# Altium PCB Toygether_PCB.PcbDoc (part 2 of 2)
Units mm, origin at the board's own origin, x right, y up, seen from the top; angles counter-clockwise.
Board outline 55 x 58.13 mm, 4 copper layers (Top Layer, Signal Layer 1, Signal Layer 2, Bottom Layer), stack 0.778 mm thick; 93 components, 74 nets, 341 pads, 140 vias.
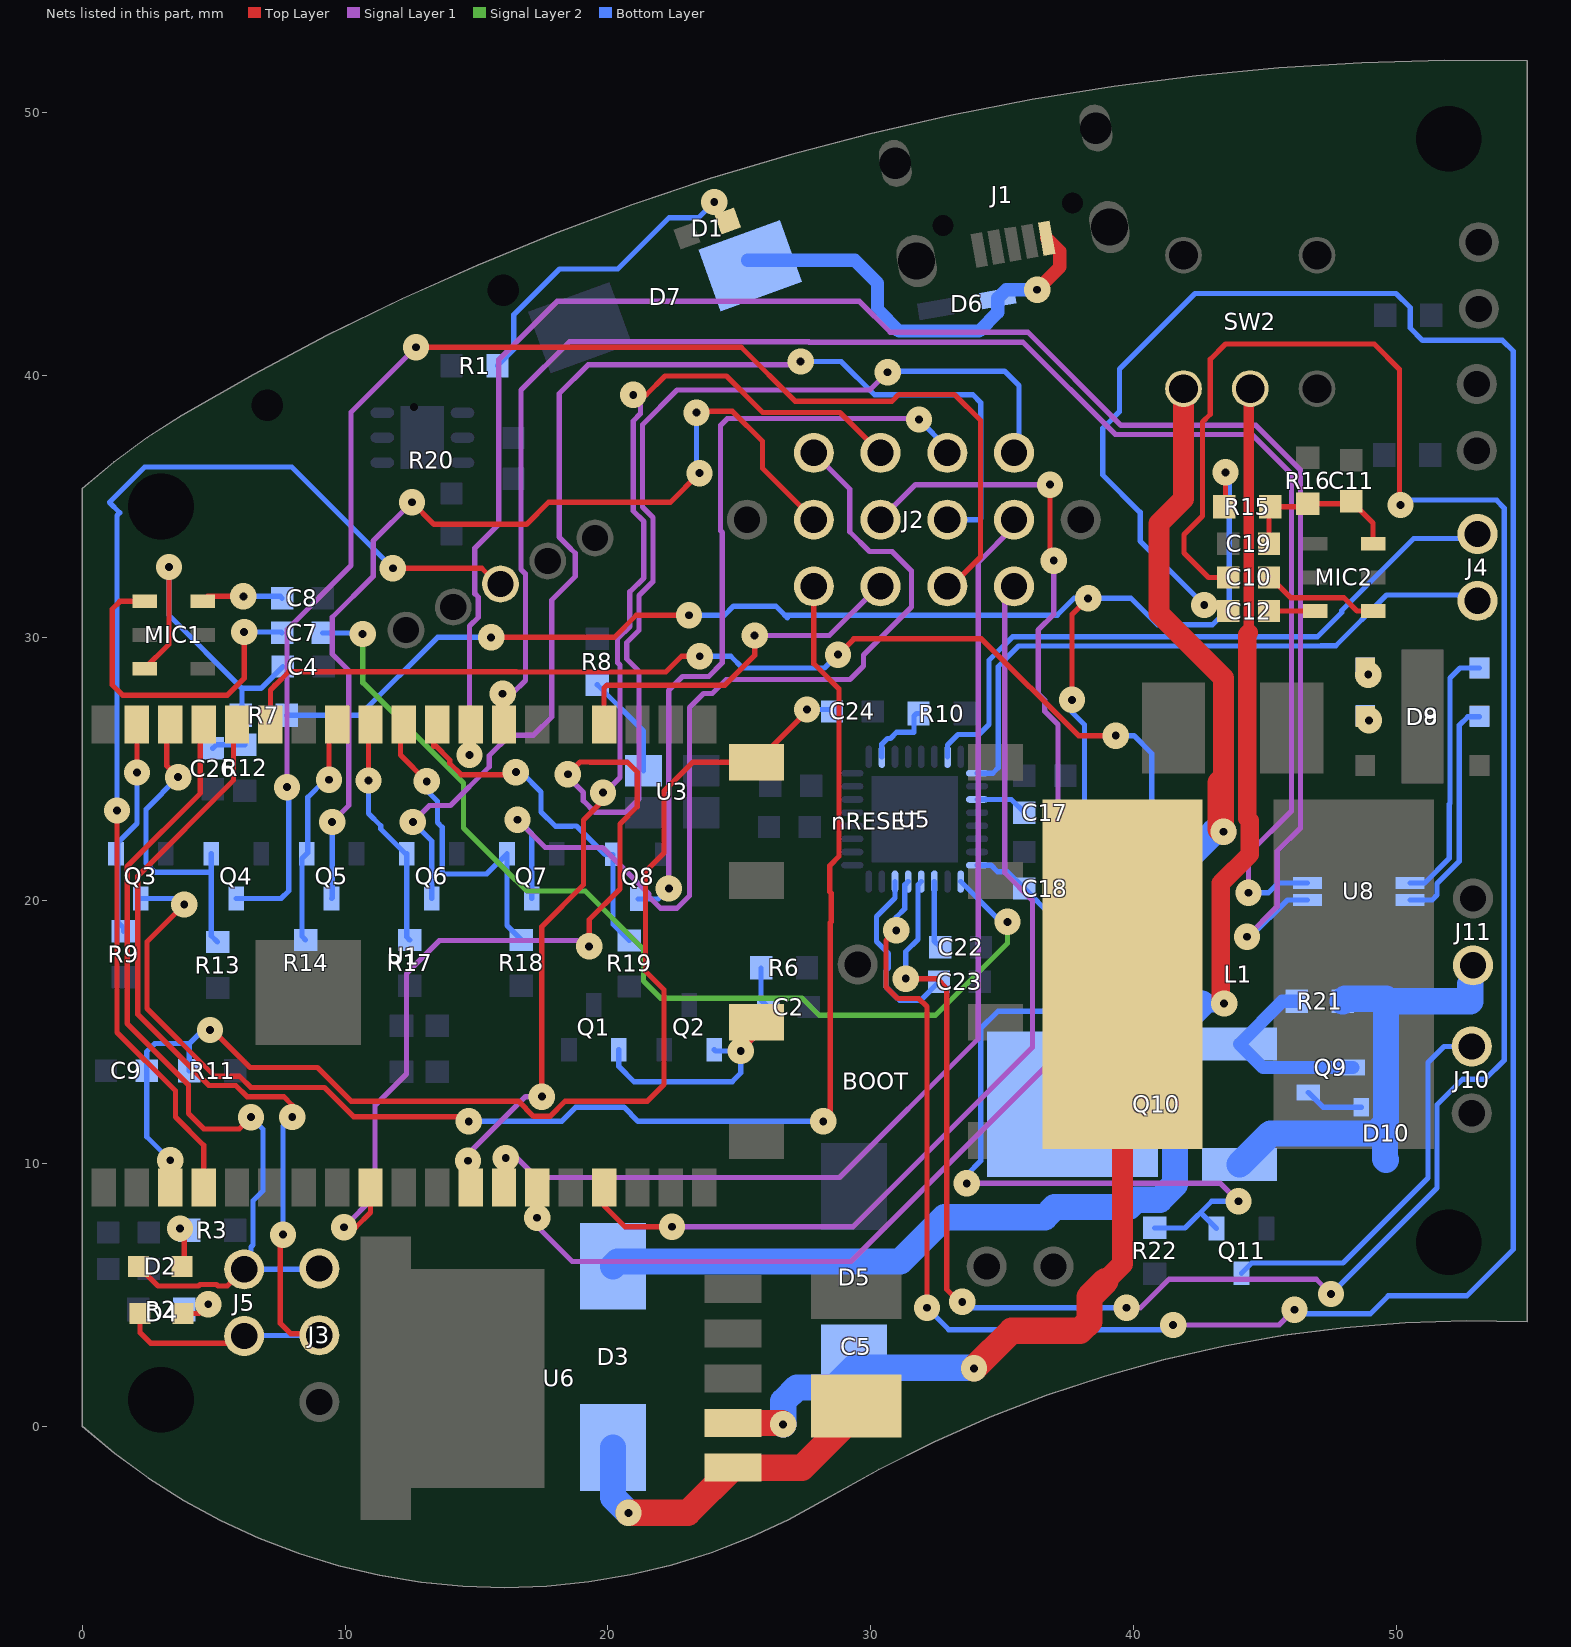
[diagram p4: the nets of this part, all layers, seen from the top]

## Via types
v1: diameter 1, hole 0.3, Top Layer to Bottom Layer, 132 vias
v2: diameter 1.27, hole 0.711, Top Layer to Bottom Layer, 8 vias

## Nets (pads, with @x,y where several pads share a name; then routed paths per layer and width w, separated by ;. In a path a pad name is that pad's centre, name@x,y a point inside that pad or via, vN(x,y) a via of type N, cw(c..) or ccw(c..) an arc to the next point about the centre after c; other vN are vias at no path point) (continued)
L1_P: C7.1 U5.1 | length 39.2
  Signal Layer 2 w0.2: v1(10.67,30.145) 10.67,28.295 10.679,28.304 14.51,24.473 14.51,22.77 16.49,20.79 16.502,20.79 16.922,20.37 19.14,20.37 21.358,18.152 21.358,16.941 22.009,16.29 27.39,16.29 28.04,15.64 32.472,15.64 35.21,18.378 v1(35.21,19.193)
  Bottom Layer w0.2: C7.1@9.155,30.19 10.625,30.19 v1(10.67,30.145) ; U5.1@33.43,20.725 34.962,19.193 v1(35.21,19.193)
L2_P: C22.2 U5.3 | length 2.6
  Bottom Layer w0.2: U5.3@32.43,20.725 32.42,20.715 32.42,18.465 C22.2@32.655,18.23
LED1: Q3.1 R9.2 U1.37 | length 8.3
  Top Layer w0.2: U1.37@1.95,26.7 2.08,26.57 v1(2.08,24.88)
  Bottom Layer w0.2: R9.2@1.57,18.835 1.57,18.97 1.36,19.18 1.36,22.217 2.08,22.937 v1(2.08,24.88)
LED2: Q4.1 R13.2 U1.36 | length 12
  Top Layer w0.2: U1.36@3.22,26.7 3.22,25.13 v1(3.65,24.7)
  Bottom Layer w0.2: v1(3.65,24.7) 2.44,23.49 2.43,23.49 2.43,21.426 2.776,21.08 4.89,21.08 4.91,21.1 ; Q4.1@4.91,21.78 4.91,21.1 ; R13.2@5.15,18.425 4.91,18.665 4.91,21.1
LED3: Q5.1 R14.2 U1.31 | length 8.8
  Top Layer w0.2: v1(9.39,24.6) 9.39,26.52 U1.31@9.57,26.7
  Bottom Layer w0.2: R14.2@8.5,18.505 8.36,18.645 8.36,21.6 Q5.1@8.54,21.78 ; v1(9.39,24.6) 9.25,24.6 8.58,23.93 8.58,21.82 Q5.1@8.544,21.784 ; Q5.1@8.54,21.78 Q5.1@8.544,21.784 ; Q5.1@8.54,21.78 Q5.1@8.544,21.784
LED4: Q6.1 R17.2 U1.30 | length 8.9
  Top Layer w0.2: U1.30@10.84,26.7 10.89,26.65 v1(10.89,24.57)
  Bottom Layer w0.2: v1(10.89,24.57) 10.89,23.319 11.36,22.849 11.36,22.73 Q6.1@12.33,21.76 ; Q6.1@12.35,21.78 12.35,18.615 R17.2@12.46,18.505
LED5: Q7.1 R18.2 U1.29 | length 12.6
  Top Layer w0.2: U1.29@12.11,26.7 12.11,25.54 v1(13.11,24.54)
  Bottom Layer w0.2: v1(13.11,24.54) 13.11,24.19 13.52,23.78 13.52,22.97 13.7,22.79 13.7,21.046 13.736,21.01 15.39,21.01 Q7.1@16.16,21.78 16.16,19.055 R18.2@16.71,18.505
LED6: Q8.1 R19.2 U1.28 | length 13.5
  Top Layer w0.2: U1.28@13.38,26.7 13.38,25.88 13.46,25.88 13.988,25.352 13.988,25.229 14.427,24.79 16.4,24.79 v1(16.5,24.89)
  Bottom Layer w0.2: v1(16.5,24.89) 16.705,24.89 17.46,24.135 17.46,23.379 18.009,22.83 18.631,22.83 18.641,22.84 18.81,22.84 19.89,21.76 Q8.1@20.2,21.76 20.2,19.105 R19.2@20.82,18.485
MIC_BIAS: C18.1 R7.2 R15.2 U5.32 | length 62.5
  Top Layer w0.2: v1(15.56,30.02) 20.244,30.02 21.084,30.86 v1(23.093,30.86) ; v1(37.67,27.64) 37.67,30.896 v1(38.28,31.506) ; R15.2@43.455,34.99 43.51,35.045 v1(43.51,36.3)
  Bottom Layer w0.2: R7.2@7.785,27.06 10.56,27.06 13.52,30.02 v1(15.56,30.02) ; v1(23.093,30.86) 24.436,30.86 24.783,31.207 26.391,31.207 26.738,30.86 ; 26.838,30.76 26.738,30.86 ; U5.32@34.055,21.35 34.579,21.35 34.829,21.1 35.215,21.1 C18.1@35.855,20.46 36.895,19.42 37.66,19.42 38.145,19.905 38.145,26.696 37.67,27.171 v1(37.67,27.64) ; v1(43.51,36.3) 43.65,36.16 43.65,31.138 43.011,30.499 40.92,30.499 39.914,31.506 v1(38.28,31.506) 37.748,31.506 37.102,30.86 26.738,30.86
NetBOOT_4: BOOT.4 C2.2 Q1.1 Q2.1 R6.2 | length 12.6
  Top Layer w0.2: v1(25.06,14.28) 25.66,14.88 BOOT.4@25.66,15.37
  Bottom Layer w0.2: Q1.1@20.42,14.33 20.42,13.69 21,13.11 24.732,13.11 25.06,13.438 v1(25.06,14.28) ; Q2.1@24.05,14.33 24.1,14.28 v1(25.06,14.28) ; R6.2@25.834,17.44 25.834,16.219 C2.2@26.103,15.951 26.103,15.323 v1(25.06,14.28)
NetC4_2: C4.2 C26.2 MIC1.6 R7.1 R12.2 | length 15.4
  Top Layer w0.2: MIC1.6@2.375,28.83 3.3,29.755 v1(3.3,32.7)
  Bottom Layer w0.2: v1(3.3,32.7) 3.3,30.86 6.08,28.08 ; C26.2@4.965,25.795 5.105,25.935 R12.2@6.18,25.935 6.035,26.08 R7.1@6.035,27.06 6.08,27.06 6.08,28.08 ; C4.2@7.635,28.91 6.805,28.08 6.08,28.08
NetC5_2: C5.2 D3.2 U6.1 | length 13.3
  Top Layer w1: v1(20.79,-3.3) 23.048,-3.3 U6.1@24.768,-1.58 27.394,-1.58 29.45,0.476 C5.2@29.45,0.77
  Bottom Layer w1: D3.2@20.2,-0.81 20.2,-2.71 v1(20.79,-3.3)
NetC7_2: C7.2 MIC1.4 | length 12.9
  Top Layer w0.2: MIC1.4@2.375,31.39 1.432,31.39 1.14,31.098 1.14,28.21 1.529,27.821 5.528,27.821 6.16,28.453 v1(6.16,30.22)
  Bottom Layer w0.2: v1(6.16,30.22) 7.575,30.22 C7.2@7.605,30.19
NetC8_2: C8.2 MIC1.3 | length 3.1
  Top Layer w0.2: MIC1.3@4.585,31.39 4.775,31.58 v1(6.13,31.58)
  Bottom Layer w0.2: v1(6.13,31.58) 7.535,31.58 C8.2@7.605,31.51
NetC10_2: C10.2 MIC2.4 | length 4.5
  Top Layer w0.2: C10.2@45.165,32.3 45.216,32.3 45.985,31.531 48.006,31.531 48.517,31.02 MIC2.4@49.125,31.02
NetC11_2: C11.2 C19.2 MIC2.6 R15.1 R16.2 | length 6.6
  Top Layer w0.2: C19.2@45.165,33.58 45.165,34.95 R15.1@45.205,34.99 46.525,34.99 R16.2@46.64,35.105 48.19,35.105 C11.2@48.29,35.205 49.125,34.37 MIC2.6@49.125,33.58
NetC12_2: C12.2 MIC2.3 | length 1.8
  Top Layer w0.2: C12.2@45.165,31.02 MIC2.3@46.915,31.02
NetC17_1: C17.1 U5.27 | length 2
  Bottom Layer w0.2: U5.27@34.055,23.85 35.355,23.85 C17.1@35.855,23.35
NetD1_1: D1.1 R1.1 | length 12.5
  Top Layer w0.2: v1(24.05,46.59) 24.05,46.377 D1.1@24.565,45.862
  Bottom Layer w0.2: R1.1@15.805,40.36 16.417,40.972 16.417,42.293 18.164,44.04 20.38,44.04 22.33,45.99 23.45,45.99 v1(24.05,46.59)
NetD2_1: D2.1 R3.1 | length 1.6
  Top Layer w0.2: v1(3.72,7.52) 3.72,7.34 3.88,7.18 D2.1@3.88,5.98
NetD3_1: D3.1 SW2.2 | length 54.8
  Top Layer w0.4: 44.39,30.19 44.39,39.423 SW2.2@44.45,39.483
  Top Layer w0.7: v1(43.458,16.085) 43.33,16.213 43.33,20.659 44.432,21.762 44.432,23.034 44.33,23.136 44.33,30.13 44.39,30.19
  Bottom Layer w0.7: 42.616,16.085 v1(43.458,16.085)
  Bottom Layer w1: D3.1@20.2,6.09 20.38,6.27 31.13,6.27 32.816,7.956 36.626,7.956 37.011,8.34 39.821,8.34 40.101,8.62 41.004,8.62 41.59,9.206 41.59,15.059 42.616,16.085
NetD4_1: D4.1 R2.1 | length 1.1
  Top Layer w0.2: D4.1@3.842,4.29 4.445,4.29 v1(4.795,4.64)
NetD5_2: D5.2 L1.1 U6.2 | length 29.5
  Top Layer w0.2: v1@26.625,0.12 v1(26.675,0.07)
  Top Layer w0.8: 38.94,5.525 39.59,6.174 L1.1@39.59,17.2
  Top Layer w1: U6.2@24.768,0.12 v1@26.625,0.12 ; v1(33.94,2.2) 35.37,3.63 37.972,3.63 38.329,3.986 38.329,4.914 38.94,5.525
  Bottom Layer w1: v1(26.675,0.07) 26.675,0.95 27.2,1.475 28.625,1.475 D5.2@29.37,2.22 33.92,2.22 v1(33.94,2.2)
NetD8_1: D8.1 U8.2 | length 10
  Bottom Layer w0.2: U8.2@50.53,20.675 51.09,20.675 52.02,21.605 52.02,23.67 52.05,23.7 52.05,28.47 52.43,28.85 D8.1@53.175,28.85
NetD8_2: D8.2 U8.3 | length 8.8
  Bottom Layer w0.2: U8.3@50.53,20.025 51.375,20.025 51.56,20.21 51.56,20.65 52.4,21.49 52.4,26.67 52.73,27 D8.2@53.175,27
NetD8_5: D8.5 D9.2 | length 0
  Top Layer w0.4: D9.2@48.825,27 D9.2@48.83,27
  other v1: 48.97,26.86
NetD8_6: D8.6 D9.1
  other v1: 48.94,28.6
NetD10_1: D10.1 Q9.1 | length 4.5
  Bottom Layer w0.2: 47.215,12.14 D10.1@48.67,12.14 47.215,12.14 ; 47.215,12.14 Q9.1@46.66,12.695 47.215,12.14
NetQ9_3: Q9.3 Q10.1 R21.1 | length 7.5
  Bottom Layer w0.5: R21.1@46.215,16.17 45.67,16.17 Q10.1@44.04,14.54 44.935,13.645 Q9.3@48.36,13.645
NetR8_2: R8.2 U3.1 | length 4
  Bottom Layer w0.2: R8.2@19.6,28.215 21.36,26.455 U3.1@21.36,24.94
NetR10_2: R10.2 U5.18 | length 2.7
  Bottom Layer w0.2: U5.18@30.43,25.475 30.43,25.956 30.649,26.175 30.759,26.175 30.997,26.413 31.65,26.413 31.65,27.025 31.745,27.12 R10.2@31.825,27.12
nOUT_LED1: J2.1 Q3.3 | length 55.3
  Top Layer w0.2: v1(3.88,19.85) 2.465,18.435 2.465,15.892 5.041,13.317 5.988,13.317 6.415,12.89 9.215,12.89 10.325,11.78 14.53,11.78 v1(14.71,11.6) ; J2.1@27.84,31.96 27.84,29.02 28.8,28.06 28.8,21.691 28.45,21.341 28.45,20.331 28.5,20.281 28.5,19.19 28.47,19.16 28.47,11.87 v1(28.2,11.6)
  Bottom Layer w0.2: Q3.3@2.23,20.08 3.65,20.08 v1(3.88,19.85) ; v1(14.71,11.6) 18.244,11.6 18.784,12.14 20.61,12.14 21.15,11.6 v1(28.2,11.6)
nOUT_LED2: J2.3 Q4.3 | length 54.6
  Top Layer w0.2: v1(12.705,41.06) 25.08,41.06 27.138,39.002 30.808,39.002 31.067,39.261 33.199,39.261 34.18,38.28 34.18,33.08 33.06,31.96 J2.3@32.92,31.96
  Signal Layer 1 w0.2: v1(7.79,24.32) 7.79,30.31 10.23,32.75 10.23,38.585 v1(12.705,41.06)
  Bottom Layer w0.2: Q4.3@5.86,20.08 7.57,20.08 7.86,20.37 7.86,24.25 v1(7.79,24.32)
nOUT_LED3: J2.5 Q5.3 | length 37.9
  Top Layer w0.2: v1(12.548,35.161) 13.389,34.32 16.906,34.32 17.747,35.161 22.381,35.161 v1(23.49,36.27) ; v1@23.592,38.62 24.75,38.62 25.886,37.484 25.886,36.454 J2.5@27.84,34.5
  Signal Layer 1 w0.2: v1@9.49,22.98 v1@9.49,22.99 ; v1(9.51,22.99) 10.14,23.62 10.14,28.761 9.514,29.387 9.514,30.784 11.07,32.339 11.07,33.684 v1(12.548,35.161)
  Bottom Layer w0.2: Q5.3@9.49,20.08 9.51,20.1 v1(9.51,22.99) ; v1(23.38,38.57) 23.38,36.38 v1(23.49,36.27)
nOUT_LED4: J2.7 Q6.3 | length 46.2
  Signal Layer 1 w0.19: 18.568,33.411 18.568,33.422 ; 18.76,33.212 18.76,33.219
  Signal Layer 1 w0.2: v1(12.58,22.99) 13.21,23.62 14.014,23.62 15.488,25.094 15.488,25.517 16.261,26.29 17.16,26.29 17.865,26.995 17.865,31.445 18.76,32.34 18.76,33.212 18.756,33.216 ; 18.563,33.422 18.15,33.835 18.15,39.29 19.25,40.39 27.21,40.39 v1(27.34,40.52) ; 18.568,33.411 18.76,33.219
  Bottom Layer w0.2: v1(12.58,22.99) 13.3,22.27 Q6.3@13.3,20.08 ; v1(27.34,40.52) 28.88,40.52 30.15,39.25 33.9,39.25 34.19,38.96 34.19,34.55 34.14,34.5 J2.7@32.92,34.5
nOUT_LED5: J2.9 Q7.3 | length 36.8
  Signal Layer 1 w0.2: v1(16.56,23.08) 17.62,22.02 19.8,22.02 21.572,20.248 21.572,20.149 22.012,19.71 22.633,19.71 23.11,20.187 23.11,27.35 23.64,27.88 23.976,27.88 24.512,28.416 29.217,28.416 29.729,28.928 29.729,29.342 31.56,31.172 31.56,32.551 30.821,33.29 29.96,33.29 29.21,34.04 29.21,35.67 J2.9@27.84,37.04
  Bottom Layer w0.2: v1(16.56,23.08) 17.11,22.53 Q7.3@17.11,20.08
nOUT_LED6: J2.11 Q8.3 | length 29.8
  Signal Layer 1 w0.2: v1(22.322,20.46) 22.322,27.982 22.307,27.997 22.84,28.53 23.84,28.53 24.35,29.04 24.36,29.04 24.36,34.009 24.288,34.081 24.288,38.088 24.55,38.35 31.8,38.35 v1(31.84,38.31)
  Bottom Layer w0.2: Q8.3@21.15,20.06 21.922,20.06 v1(22.322,20.46) ; v1(31.84,38.31) 32.92,37.23 J2.11@32.92,37.04
nOUT_VIBRATOR: J10.2 Q11.3 | length 14.9
  Bottom Layer w0.2: Q11.3@44.12,5.82 44.507,6.207 47.976,6.207 51.21,9.441 51.21,13.84 51.82,14.45 J10.2@52.88,14.45
nRESET: C9.2 C24.2 nRESET.4 R11.1 U1.3 | length 48
  Top Layer w0.2: U1.3@3.35,9.08 v1(3.35,10.121) ; v1(4.86,15.08) 4.956,15.08 6.382,13.654 8.946,13.654 10.23,12.37 16.599,12.37 17.179,11.79 17.801,11.79 18.381,12.37 21.51,12.37 22.14,13 22.14,16.607 21.434,17.314 21.434,21.113 22.14,21.819 22.14,24.17 23.24,25.27 nRESET.4@25.66,25.27 27.584,27.194 v1(27.584,27.276)
  Bottom Layer w0.2: v1(3.35,10.121) 2.455,11.016 C9.2@2.455,13.53 2.455,14.257 2.763,14.565 4.075,14.565 ; R11.1@4.075,13.53 4.075,14.565 ; v1(4.86,15.08) 4.59,15.08 4.075,14.565 ; v1(27.584,27.276) 28.459,27.276 C24.2@28.535,27.2
PRES_LED_CLK: U1.27 U8.6 | length 72.4
  Top Layer w0.2: U1.27@14.65,26.7 14.738,26.612 v1(14.738,25.54)
  Signal Layer 1 w0.2: v1(14.738,25.54) 14.738,30.447 15.07,30.779 15.07,31.553 14.94,31.683 14.94,33.422 15.855,34.337 15.855,40.59 18.072,42.807 29.577,42.807 30.752,41.631 35.994,41.631 39.538,38.088 44.667,38.088 46.366,36.388 46.366,22.77 45.473,21.877 45.473,19.771 v1(44.33,18.628)
  Bottom Layer w0.2: v1(44.33,18.628) 44.466,18.628 45.863,20.025 U8.6@46.63,20.025
PRES_LED_SD: U1.26 U8.7 | length 63.4
  Signal Layer 1 w0.19: 16.7,32.603 16.7,32.61 ; 16.868,32.43 16.868,32.435
  Signal Layer 1 w0.2: v1(15.998,27.871) 16.359,27.871 16.868,28.38 16.868,32.43 ; 16.7,32.603 16.868,32.435 ; 16.7,32.61 16.7,39.43 18.54,41.27 27.651,41.27 27.671,41.25 35.804,41.25 39.316,37.738 44.522,37.738 46.016,36.243 46.016,23.414 44.386,21.784 v1(44.386,20.301)
  Bottom Layer w0.2: v1(44.386,20.301) 45.146,20.301 45.52,20.675 U8.7@46.63,20.675
R1_N: C12.1 U5.5 | length 105.3
  Top Layer w0.2: v1(30.98,18.87) 30.59,18.48 30.59,16.719 31.029,16.28 31.83,16.28 32.145,15.965 v1(32.145,4.505) ; v1(42.701,31.249) 43.386,31.249 C12.1@43.615,31.02
  Signal Layer 1 w0.2: v1(41.516,3.85) 45.55,3.85 v1(46.13,4.43)
  Bottom Layer w0.2: v1(30.98,18.87) 30.98,19.37 31.305,19.695 31.305,20.6 U5.5@31.43,20.725 ; v1(32.145,4.505) 32.98,3.67 41.336,3.67 v1(41.516,3.85) ; v1(42.701,31.249) 40.26,33.69 40.26,34.777 38.834,36.203 38.834,37.974 39.47,38.61 39.47,40.23 42.35,43.11 50,43.11 50.54,42.57 50.54,41.792 51.01,41.322 54.05,41.322 54.462,40.91 54.462,6.732 52.69,4.96 49.7,4.96 49.02,4.28 46.28,4.28 v1(46.13,4.43)
R1_P: C10.1 U5.4 | length 92.9
  Top Layer w0.2: v1(31.34,17.03) 32.53,17.03 32.9,16.66 32.9,5.2 33.37,4.73 v1(33.49,4.73) ; C10.1@43.615,32.3 42.858,32.3 41.93,33.228 41.93,33.932 42.635,34.637 42.635,38.213 42.93,38.508 42.93,40.6 43.51,41.18 49.17,41.18 50.13,40.22 50.13,35.1 v1(50.17,35.06)
  Signal Layer 1 w0.2: v1(39.743,4.506) 40.276,4.506 41.36,5.59 46.96,5.59 v1(47.52,5.03)
  Bottom Layer w0.2: v1(31.34,17.03) 31.34,18.06 31.805,18.525 31.805,20.6 U5.4@31.93,20.725 ; v1(33.49,4.73) 33.714,4.506 v1(39.743,4.506) ; v1(47.52,5.03) 51.56,9.07 51.56,12.233 52.527,13.2 53.39,13.2 54.112,13.922 54.112,34.946 53.84,35.218 53.84,35.25 50.36,35.25 v1(50.17,35.06)
R2_P: C23.2 U5.6 | length 7.1
  Bottom Layer w0.2: U5.6@30.93,20.725 30.93,20.098 30.23,19.398 30.23,18.441 30.682,17.989 30.682,17.433 30.59,17.341 30.59,16.719 31.029,16.28 31.042,16.28 31.11,16.212 31.11,16.2 31.894,16.2 C23.2@32.605,16.911
RXD: D2.2 J3.1 J5.2 U1.35 | length 33.4
  Top Layer w0.2: D2.2@2.23,5.98 2.88,5.33 4.424,5.33 4.484,5.39 5.106,5.39 5.166,5.33 5.52,5.33 J5.2@6.16,5.97 ; U1.35@4.49,26.7 4.49,24.08 1.708,21.298 1.708,15.321 4.04,12.989 4.04,11.9 4.626,11.314 5.974,11.314 v1(6.42,11.76)
  Bottom Layer w0.2: v1(6.42,11.76) 6.879,11.301 6.879,8.959 6.5,8.58 6.5,6.896 6.42,6.816 6.42,6.23 J5.2@6.16,5.97 8.99,5.97 J3.1@9.02,6
SOUND_LEVEL: R20.2 U1.4 | length 44.7
  Top Layer w0.2: v1(1.32,23.43) 1.32,14.989 3.544,12.765 3.544,11.767 4.62,10.691 U1.4@4.62,9.08 ; v1(11.82,32.65) 15.202,32.65 R20.2@15.695,32.157
  Bottom Layer w0.2: v1(1.32,23.43) 1.32,34.657 1.424,34.761 1.032,35.153 1.04,35.161 2.379,36.5 7.97,36.5 v1(11.82,32.65)
SPK+: J4.1 U5.25 | length 24.7
  Bottom Layer w0.2: U5.25@34.055,24.85 34.65,24.85 34.86,25.06 34.86,28.914 35.636,29.689 47.144,29.689 47.155,29.7 47.705,29.7 49.635,31.63 53.15,31.63 J4.1@53.54,31.24
SPK-: J4.2 U5.23 | length 25.4
  Bottom Layer w0.2: U5.23@32.93,25.475 32.93,25.92 33.33,26.32 34.123,26.32 34.51,26.707 34.51,29.151 35.399,30.039 46.999,30.039 47.93,30.97 47.93,31.04 50.67,33.78 52.93,33.78 J4.2@53.1,33.95
TXD: D4.2 J3.2 J5.1 U1.34 | length 37.9
  Top Layer w0.2: D4.2@2.2,4.44 2.2,3.56 2.6,3.16 J5.1@6.16,3.16 ; U1.34@5.76,26.7 5.76,24.58 2.115,20.935 2.115,15.67 4.818,12.967 5.843,12.967 6.27,12.54 7.665,12.54 7.99,12.215 v1(7.99,11.77) ; v1(7.64,7.29) 7.53,7.18 7.53,3.92 7.93,3.52 8.96,3.52 J3.2@9.02,3.46
  Bottom Layer w0.2: J5.1@5.95,3.45 8.78,3.45 J3.2@8.81,3.48 ; v1(7.64,7.29) 7.64,11.42 v1(7.99,11.77)
VBAT: D10.3 J11.1 Q10.2 R21.2 | length 19
  Bottom Layer w0.2: D10.3@49.41,10.35 49.579,10.181 D10.3@49.62,10.14 ; J11.1@52.82,16.82 J11.1@53.37,17.37
  Bottom Layer w1: Q10.2@44.04,9.96 45.22,11.14 49.239,11.14 49.579,11.48 ; R21.2@47.965,16.17 48.065,16.27 49.62,16.27 ; D10.3@49.62,10.14 49.579,10.181 49.579,11.48 ; J11.1@52.82,16.82 52.82,16.17 49.72,16.17 49.62,16.27 ; 49.579,11.48 49.62,11.48 49.62,16.27
VBUS: D6.2 D7.1 J1.1 | length 16.2
  Top Layer w0.5: v1(36.34,43.25) 37.2,44.11 37.2,44.713 J1.1@36.7,45.213
  Bottom Layer w0.5: D7.1@25.322,44.37 29.397,44.37 30.267,43.5 30.267,42.488 31.08,41.674 34.13,41.674 34.842,42.386 D6.2@34.842,42.928 35.163,43.25 v1(36.34,43.25)
VIBRATOR: Q11.1 R22.2 U1.33 | length 75.2
  Top Layer w0.2: U1.33@7.16,26.7 7.16,28.01 7.35,28.2 ; 7.32,28.2 7.35,28.2 ; v1(23.5,29.3) 22.804,29.3 22.207,28.703 16.526,28.703 16.519,28.71 7.86,28.71 7.35,28.2 ; v1(28.76,29.36) 29.363,29.963 34.226,29.963 37.909,26.28 v1(39.33,26.28)
  Signal Layer 1 w0.2: v1(33.66,9.24) 43.32,9.24 v1@43.96,8.6 ; v1(44,8.56) v1@43.96,8.6 ; v1@44.04,8.6 v1@43.96,8.6
  Bottom Layer w0.2: v1@23.35,29.3 v1(23.5,29.3) 24.682,29.3 25.132,28.85 28.25,28.85 v1(28.76,29.36) ; v1(33.66,9.24) 33.66,9.56 34.19,10.09 34.19,15.129 34.851,15.79 39.634,15.79 40.7,16.856 40.7,25.6 40.02,26.28 v1(39.33,26.28) ; R22.2@40.82,7.545 41.971,7.545 42.986,8.56 v1(44,8.56) ; 42.61,8.08 Q11.1@43.17,7.52
VSYS: Q10.3 SW2.1 | length 31.3
  Top Layer w0.8: SW2.1@41.91,39.483 41.91,35.285 40.98,34.355 40.98,30.931 43.43,28.48 43.43,24.575 43.33,24.475
  Top Layer w1: 43.33,24.475 43.33,22.722 v1(43.432,22.62)
  Bottom Layer w1: Q10.3@37.69,12.25 37.69,12.786 41.6,16.696 41.6,21.137 43.083,22.62 v1(43.432,22.62)
Z1: J2.2 U1.23 | length 14
  Top Layer w0.2: U1.23@19.86,26.7 19.86,28.088 19.972,28.2 24.46,28.2 25.59,29.33 v1(25.59,30.09)
  Signal Layer 1 w0.2: v1(25.59,30.09) 28.429,30.09 30.299,31.96 J2.2@30.38,31.96
Z2: J2.4 U1.16 | length 38.3
  Top Layer w0.2: U1.16@19.86,9.08 19.86,8.39 20.66,7.59 v1(22.44,7.59)
  Signal Layer 1 w0.2: v1(22.44,7.59) 29.336,7.59 36.167,14.421 36.167,20.001 35.105,21.063 35.105,31.605 J2.4@35.46,31.96
Z3: J2.6 U1.14 | length 54.4
  Top Layer w0.2: v1(17.31,7.93) 17.32,7.94 U1.14@17.32,9.08 ; v1(36.83,35.83) 36.83,33.08 v1(36.97,32.94)
  Signal Layer 1 w0.2: v1(17.31,7.93) 17.31,7.607 18.647,6.27 29.258,6.27 37.133,14.146 37.133,26.701 36.633,27.202 36.633,27.625 36.378,27.88 36.378,30.297 36.97,30.889 v1(36.97,32.94) ; J2.6@30.38,34.5 31.71,35.83 v1(36.83,35.83)
Z4: J2.8 U1.13 | length 42
  Top Layer w0.2: U1.13@16.05,9.08 16.115,9.145 v1(16.115,10.208)
  Signal Layer 1 w0.2: v1(16.115,10.208) 16.542,10.208 17.283,9.467 28.821,9.467 34.098,14.744 34.098,32.87 35.46,34.232 J2.8@35.46,34.5
Z5: J2.10 U1.12 | length 44.8
  Top Layer w0.2: v1(14.683,10.1) 14.683,9.177 U1.12@14.78,9.08 ; v1(17.49,12.54) 17.49,19.02 19.075,20.605 19.075,23.07 19.82,23.815 v1(19.82,24.11) ; v1(20.97,39.25) 21.465,39.25 22.179,39.964 24.512,39.964 25.897,38.579 28.841,38.579 J2.10@30.38,37.04
  Signal Layer 1 w0.2: v1(14.683,10.1) 14.683,10.353 16.87,12.54 v1(17.49,12.54) ; v1(19.82,24.11) 19.88,24.11 20.463,24.693 20.463,28.963 20.37,29.056 20.37,29.967 20.84,30.437 20.84,31.753 21.372,32.284 21.372,34.433 20.97,34.835 20.97,38.255 21.248,38.533 21.248,38.972 v1(20.97,39.25)
Z6: J2.12 U1.9 | length 67.6
  Top Layer w0.2: v1(9.958,7.572) 10.41,7.572 10.97,8.133 U1.9@10.97,9.08 ; v1(18.48,24.81) 18.944,25.274 19.326,25.274 19.33,25.27 20.742,25.27 21.12,24.892 21.12,23.571 20.462,22.913 20.462,20.443 19.29,19.27 v1(19.29,18.26)
  Signal Layer 1 w0.2: v1(9.958,7.572) 11.141,8.755 11.141,12.21 12.34,13.409 12.34,17.23 13.59,18.48 19.07,18.48 v1(19.29,18.26) ; v1(18.48,24.81) 18.48,24.709 18.81,24.379 19.07,24.119 19.07,23.799 19.509,23.36 20.677,23.36 21.19,23.873 21.19,28.731 20.72,29.201 20.72,29.823 21.19,30.293 21.19,31.608 21.722,32.139 21.722,34.578 21.32,34.98 21.32,38.11 22.64,39.43 29.97,39.43 v1(30.65,40.11)
  Bottom Layer w0.2: v1(30.65,40.11) 30.69,40.15 35.1,40.15 35.65,39.6 35.65,37.23 J2.12@35.46,37.04
pads on no net: BOOT.2 BOOT.3 D9.5 D9.6 D10.2 J1. J1.2 J1.3 J1.5 nRESET.2 nRESET.3 R20.4 R20.5 SW2.4 SW2.5 U1.17 U1.18 U1.19 U1.20 U1.21 U1.22 U1.32 U2.1 U2.4 U2.5 U5.15 U5.19 U5.20 U5.21 U5.22 U5.29 U5.30

## Polygon pours and split planes (outlines as drawn)
GND on Top Layer "Top Layer-GND" (solid, remove dead copper, pour order 8): 55,51.97 51.844,51.982 48.69,51.891 45.541,51.697 42.399,51.4 39.269,51.001 36.154,50.499 33.056,49.896 29.98,49.192 26.929,48.387 23.906,47.484 20.914,46.482 17.956,45.382 15.036,44.187 12.156,42.896 9.32,41.512 6.531,40.037 3.791,38.47 2.468,37.625 1.202,36.694 0,35.683 0,0 1.225,-1.03 2.517,-1.976 3.868,-2.833 5.274,-3.599 6.728,-4.269 8.223,-4.84 9.753,-5.311 11.311,-5.679 12.89,-5.941 14.483,-6.098 16.083,-6.149 17.682,-6.092 19.275,-5.93 20.853,-5.661 22.409,-5.287 23.937,-4.811 25.43,-4.234 26.882,-3.558 28.285,-2.788 30.315,-1.647 32.397,-0.606 34.527,0.334 36.699,1.171 38.91,1.903 41.152,2.528 43.423,3.045 45.715,3.452 48.024,3.748 50.345,3.934 52.672,4.008 55,3.97
GND on Bottom Layer "Bottom Layer-GND" (solid, remove dead copper, pour order 9): 55,51.97 51.844,51.982 48.69,51.891 45.541,51.697 42.399,51.4 39.269,51.001 36.154,50.499 33.056,49.896 29.98,49.192 26.929,48.387 23.906,47.484 20.914,46.482 17.956,45.382 15.036,44.187 12.156,42.896 9.32,41.512 6.531,40.037 3.791,38.47 2.468,37.625 1.202,36.694 0,35.683 0,0 1.225,-1.03 2.517,-1.976 3.868,-2.833 5.274,-3.599 6.728,-4.269 8.223,-4.84 9.753,-5.311 11.311,-5.679 12.89,-5.941 14.483,-6.098 16.083,-6.149 17.682,-6.092 19.275,-5.93 20.853,-5.661 22.409,-5.287 23.937,-4.811 25.43,-4.234 26.882,-3.558 28.285,-2.788 30.315,-1.647 32.397,-0.606 34.527,0.334 36.699,1.171 38.91,1.903 41.152,2.528 43.423,3.045 45.715,3.452 48.024,3.748 50.345,3.934 52.672,4.008 55,3.97
GND on Signal Layer 1 "Signal Layer 1-GND" (solid, remove dead copper, pour order 12): 55,51.97 51.844,51.982 48.69,51.891 45.541,51.697 42.399,51.4 39.269,51.001 36.154,50.499 33.056,49.896 29.98,49.192 26.929,48.387 23.906,47.484 20.914,46.482 17.956,45.382 15.036,44.187 12.156,42.896 9.32,41.512 6.531,40.037 3.791,38.47 2.468,37.625 1.202,36.694 0,35.683 0,0 1.225,-1.03 2.517,-1.976 3.868,-2.833 5.274,-3.599 6.728,-4.269 8.223,-4.84 9.753,-5.311 11.311,-5.679 12.89,-5.941 14.483,-6.098 16.083,-6.149 17.682,-6.092 19.275,-5.93 20.853,-5.661 22.409,-5.287 23.937,-4.811 25.43,-4.234 26.882,-3.558 28.285,-2.788 30.315,-1.647 32.397,-0.606 34.527,0.334 36.699,1.171 38.91,1.903 41.152,2.528 43.423,3.045 45.715,3.452 48.024,3.748 50.345,3.934 52.672,4.008 55,3.97
5V on Signal Layer 2 "Signal Layer 2-5V" (solid, remove dead copper, pour order 22): 21.83,33.06 21.49,33.4 21.49,41.38 24.99,44.88 28.9,44.88 44.67,29.11 51.25,29.11 52.45,27.91 52.45,20.16 45.97,20.16 33.07,33.06
3V3 on Signal Layer 2 "Signal Layer 2-3V3" (solid, remove dead copper, pour order 23): 55,51.97 51.844,51.982 48.69,51.891 45.541,51.697 42.399,51.4 39.269,51.001 36.154,50.499 33.056,49.896 29.98,49.192 26.929,48.387 23.906,47.484 20.914,46.482 17.956,45.382 15.036,44.187 12.156,42.896 9.32,41.512 6.531,40.037 3.791,38.47 2.468,37.625 1.202,36.694 0,35.683 0,0 1.225,-1.03 2.517,-1.976 3.868,-2.833 5.274,-3.599 6.728,-4.269 8.223,-4.84 9.753,-5.311 11.311,-5.679 12.89,-5.941 14.483,-6.098 16.083,-6.149 17.682,-6.092 19.275,-5.93 20.853,-5.661 22.409,-5.287 23.937,-4.811 25.43,-4.234 26.882,-3.558 28.285,-2.788 30.315,-1.647 32.397,-0.606 34.527,0.334 36.699,1.171 38.91,1.903 41.152,2.528 43.423,3.045 45.715,3.452 48.024,3.748 50.345,3.934 52.672,4.008 55,3.97

## Other copper
Top Layer:
  text "EPFL" at 48.81,4.63 h1.52
  text "TOP" at 3.94,-1.8 h1.52
  text "1" at 13.51,-5.19 h1.52
Signal Layer 1:
  text "2" at 14.87,-5.22 h1.52
Signal Layer 2:
  text "3" at 16.17,-5.28 h1.52
Bottom Layer:
  text "BOT" at 8,-1.8 h1.52
  text "4" at 19.2,-5.17 h1.52

## Silkscreen, mask and mechanical layers (free items; w line width, h text height)
Top Overlay:
  text "ON" at 20.1,43.89 h1.52 r18.73
  text "ToygetherV2" at 19.05,39.74 h2
  text "SPK" at 50.13,31.91 h1.52
  text "BAT" at 52.14,23.1 h1.52 r270
  text "VIBR" at 49.08,8.59 h1.52
  text "BAT" at 38.94,5.28 h1.52
  text "G" at 6.34,-0.23 h1.52
Bottom Overlay:
  text "11.18" at 49.6,48.95 h1.52
  text "SimoneSanso" at 54.25,46.83 h1.52
Mechanical 6:
  lines w0.01: 0,0 4.375,-3.2 7.9,-4.8 11.125,-5.6 15.2,-6.125 18.925,-6.025 22.2,-5.35 23.625,-4.925 26.275,-3.825 28.375,-2.775 32.45,-0.55 33.5,-0.1 38.725,1.9 43.775,3.15 47.775,3.75 51.2,3.975 54.975,4 55.05,51.975 49.8,51.975 45.575,51.725 38.35,50.85 29.375,49.075 20.55,46.35 19,45.775 17.175,45.075 15.375,44.325 14.525,43.95 12.15,42.9 11.15,42.4 9.3,41.5 6.975,40.275 5.325,39.35 3.725,38.425 3.3,38.15 2.325,37.525 1.2,36.7 0,35.675 0,0
Mechanical 32:
  lines w0.127: 21.49,33.4 21.83,33.06 33.07,33.06 45.97,20.16 52.45,20.16 52.45,27.91 51.25,29.11 44.67,29.11 28.9,44.88 24.99,44.88 21.49,41.38 21.49,33.4

## Dimensions
3,1 to 3,35 on Mechanical 8
52,49 to 3,35 on Mechanical 8
52,7 to 52,49 on Mechanical 8
3,1 to 52,7 on Mechanical 8
3,1 to 52,7 on Mechanical 8
0.33,0.07 to 3,35 on Mechanical 8
0,35.683 to 3,35 on Mechanical 8
0,35.683 to 3,35 on Mechanical 8
0,0 to 3,1 on Mechanical 8
0,0 to 3,1 on Mechanical 8
0,0 to 0,35.683 on Mechanical 8
55.11,3.97 to 0,0 on Mechanical 8
55.11,52.14 to 55,3.97 on Mechanical 8

## Text inside footprints (layer, text, board x,y; h text height)
J1: Mechanical 1 "PCB EDGE" at 41.637,51.77 h0.3 r190